# EAGLE board Optogenetic-stimulator-v2 (EAGLE 9.6.2)
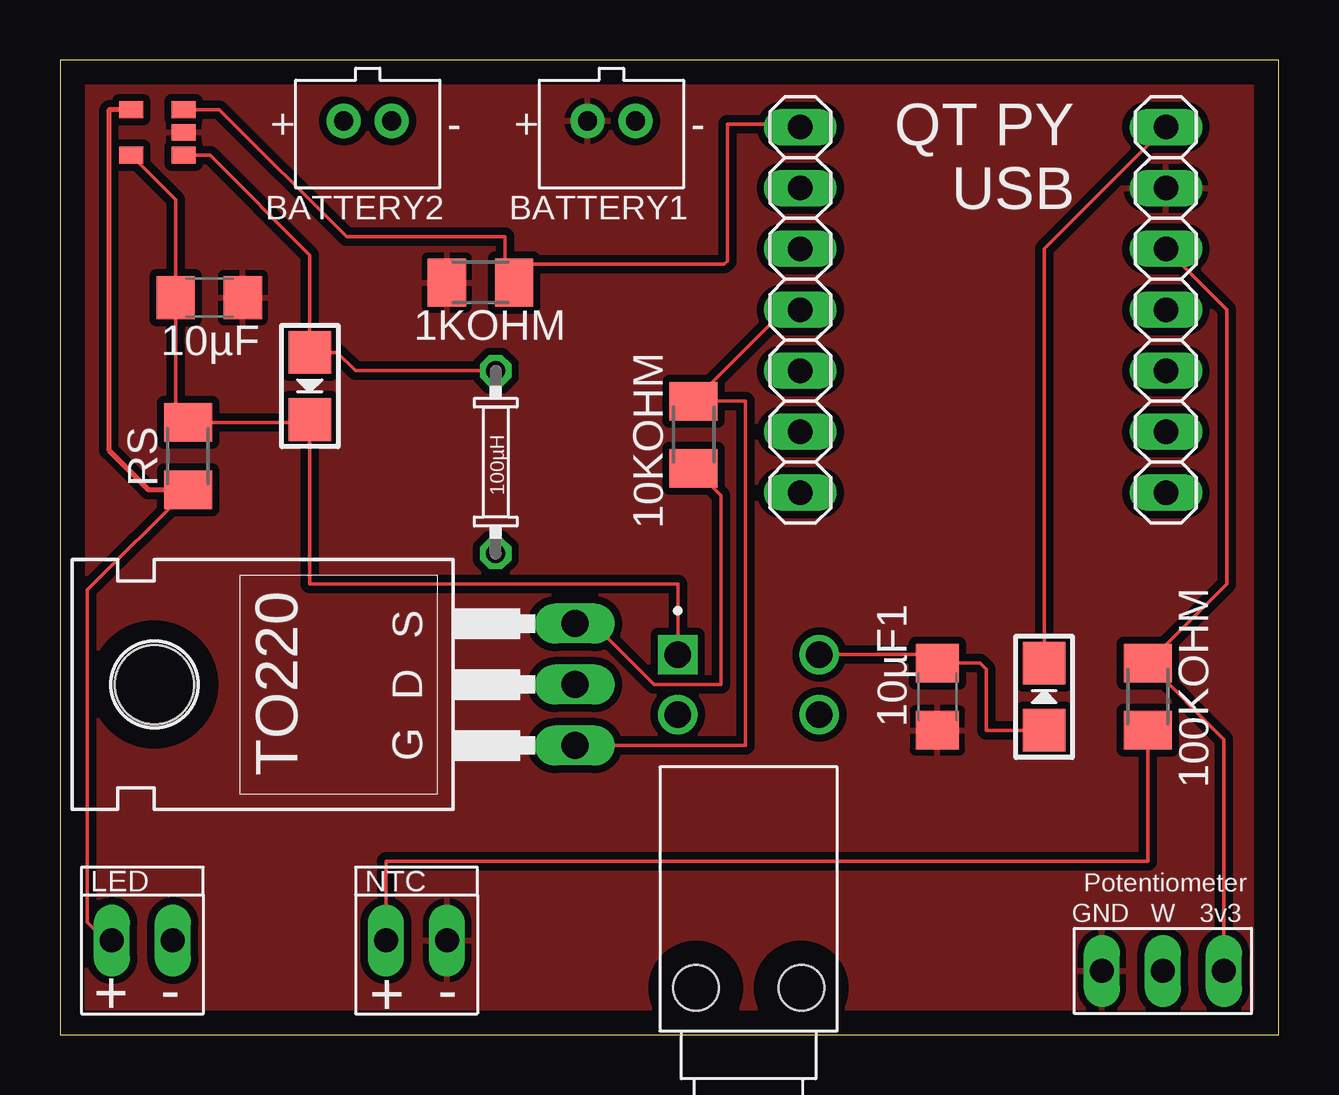
[diagram p0: board, top side]
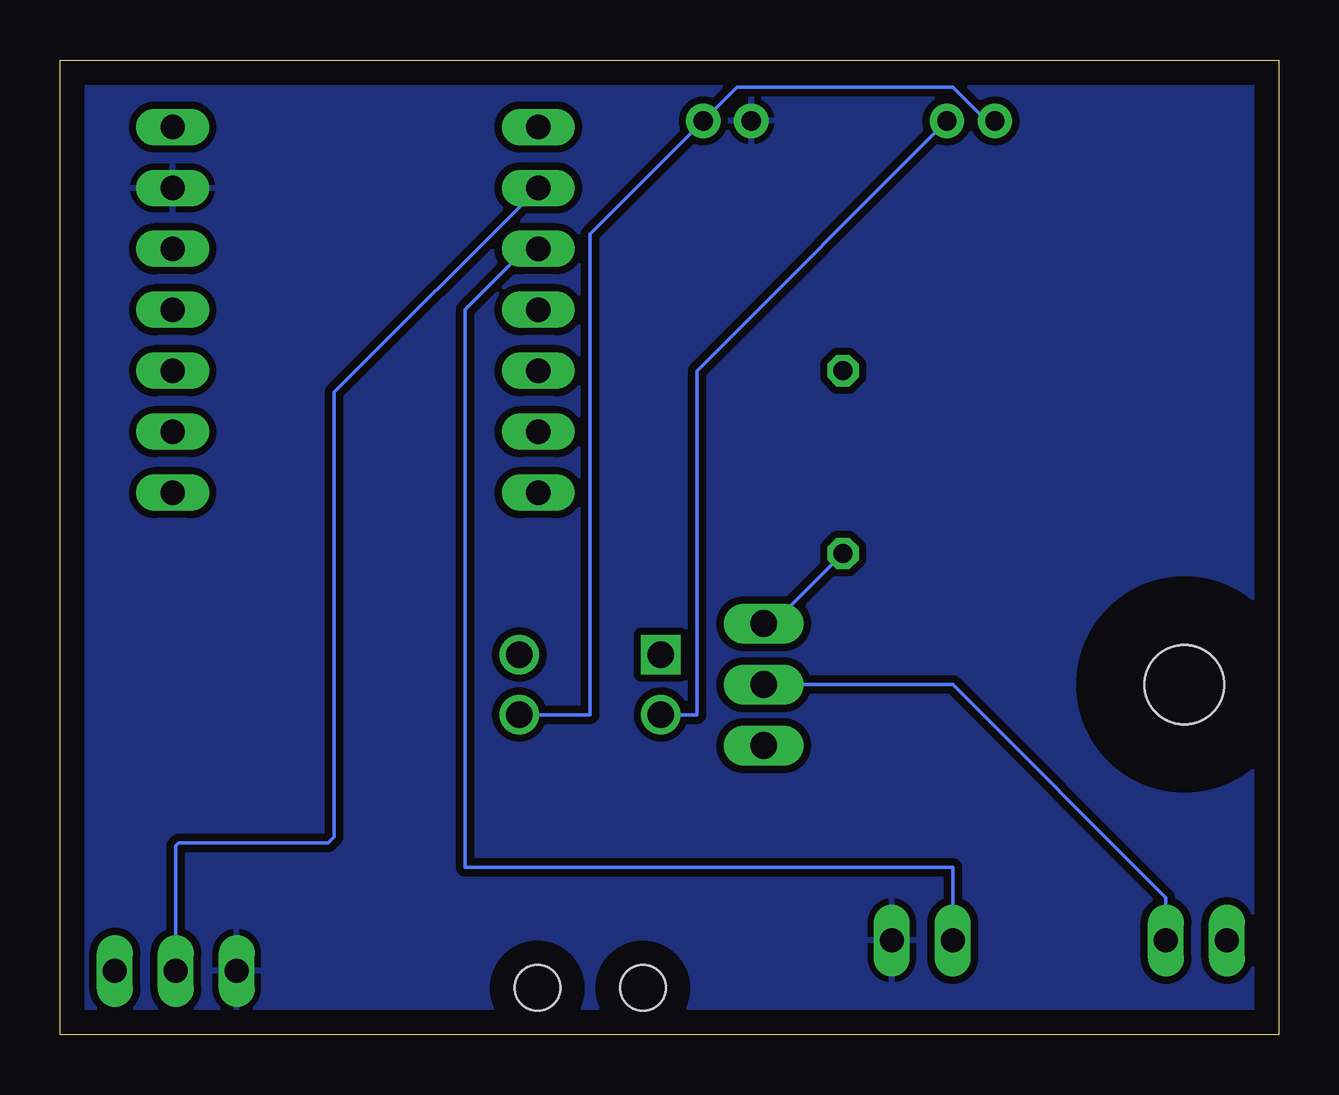
[diagram p1: board, bottom side, seen from below]

Size 50.8 x 40.64 mm. Coordinates in mm from the lower left corner, seen from the top.
Outline: 0,0 50.8,0 50.8,40.64 0,40.64 0,0
Copper layers (1*16): Top 0.035mm / dielectric 1.5mm / Bottom 0.035mm
Design rules "default": minimum track width 6mil, minimum drill 0.35mm, track to track 6mil, track to pad 6mil, pad to pad 6mil, via to via 6mil, smd to smd 6mil, copper to edge 40mil, drill to drill 6mil, minimum pad ring 10mil, minimum via ring 8mil, stop-mask expansion 4mil, vias tented up to drill 0mil, thermal gap 10mil

## Footprints (pad centres in the part's own frame; a part is rotated, then mirrored left to right if it is on the bottom)
M1206 = smd 1.6 x 2: 1 -1.4,0; 2 1.4,0
C1206 = smd 1.6 x 1.8: 1 -1.4,0; 2 1.4,0
AL8860WT = smd 1 x 0.7: CTRL -1.1,-2.25; GND -1.1,-1.3; SET 1.1,-2.25; SW -1.1,-0.35; VIN 1.1,-0.35
JST-PH-2-THM = drill 0.8 pad 1.422: 1 1,0; 2 -1,0
DIODE = smd 1.778 x 1.778: P$1 -1.397,0; P$2 1.397,0
UNIVERSAL_PAD = drill 1 long: P$1 -1.27,0; P$2 1.27,0
1X07 = drill 1.016 long: 1 -7.62,0; 2 -5.08,0; 3 -2.54,0; 4 0,0; 5 2.54,0; 6 5.08,0; 7 7.62,0
SW_PB400EEQR1BLK = drill 1.1 square: 1 -1.25,-2.95 | drill 1.1: 2 1.25,-2.95; 3 -1.25,2.95; 4 1.25,2.95 | hole 1.9: 12.65,2.2; 12.65,-2.2
TO220 = drill 1.118 long: 1 -2.54,-6.35; 2 0,-6.35; 3 2.54,-6.35 | hole 3.302: 0,11.176
INDUCTOR = drill 0.8 pad 1.27 octagon: P$1 0,0; P$2 0,-7.62
POTENTIOMETER_BOARD = drill 1 long: 3V3 2.54,0; GND -2.54,0; W 0,0

## Placement (x,y rotation side)
1KOHM  1k Ohm  [M1206]  17.53,31.37 180 top
10KOHM  [M1206]  26.42,25.02 270 top
10µF  10µF  [C1206]  6.22,30.73 180 top
10µF1  10µF  [C1206]  36.58,14.1 90 top
100KOHM  100k Ohm  [M1206]  45.34,14.1 270 top
AL8860WT1  AL8860WT  [AL8860WT]  4.06,36.32 180 top
BATTERY1  [JST-PH-2-THM]  22.99,38.1 180 top
BATTERY2  [JST-PH-2-THM]  12.83,38.1 180 top
DIODE1  DIODE_BOARD  [DIODE]  41.02,14.1 90 top
DIODE2  DIODE_BOARD  [DIODE]  10.41,27.05 270 top
LED  UNIVERSAL_PAD  [UNIVERSAL_PAD]  3.43,3.94 0 top
NTC  UNIVERSAL_PAD  [UNIVERSAL_PAD]  14.86,3.94 0 top
PY  [1X07]  46.1,30.23 270 top
QT  [1X07]  30.86,30.23 270 top
RS  0.15OHM  [M1206]  5.33,24.13 90 top
S1  PB400EEQR1BLK  [SW_PB400EEQR1BLK]  28.7,14.61 270 top
TO220  [TO220]  15.11,14.61 90 top
U$1  BOARD_INDUCTOR  [INDUCTOR]  18.16,20.07 180 top
U$6  POTENTIOMETER_BOARD  [POTENTIOMETER_BOARD]  45.97,2.67 0 top

## Library data of the parts
1KOHM 10KOHM 100KOHM RS = rcl; SPICEPREFIX: R
10µF 10µF1 = rcl; SPICEPREFIX: C
AL8860WT1 = AL8860WT
BATTERY1 BATTERY2 = adafruit
DIODE1 DIODE2 = DIODE_BOARD
LED NTC = UNIVERSAL_PAD
PY QT = pinhead
S1 = Custom_Board; AVAILABILITY: In Stock; CHECK_PRICES: https://www.snapeda.com/parts/PB400EEQR1BLK/E-Switch/view-part/?ref=eda; DESCRIPTION: Pushbutton Switch, DPST,OFF-ON, Round Actuator,3A,30VDC, R/A PC, PB400 Series | E-Switch PB400EEQR1BLK; MF: E-Switch; MP: PB400EEQR1BLK; PACKAGE: None; PRICE: None; PURCHASE-URL: https://www.snapeda.com/api/url_track_click_mouser/?unipart_id=2760202&manufacturer=E-Switch&part_name=PB400EEQR1BLK&search_term=None; SNAPEDA_LINK: https://www.snapeda.com/parts/PB400EEQR1BLK/E-Switch/view-part/?ref=snap
TO220 = Custom_Board
U$1 = INDUCTOR_BOARD
U$6 = POTENTIOMETER_BOARD

## Nets
3V3: 100KOHM.1 PY.3 U$6.3V3
7V: 10µF.2 AL8860WT1.VIN DIODE2.P$2 RS.2 S1.1
A0: 1KOHM.1 AL8860WT1.CTRL QT.1
A3: 10KOHM.1 QT.4 TO220.1
GND: 1KOHM.2 10µF1.1 10µF.1 AL8860WT1.GND BATTERY1.1 NTC.P$2 PY.2 U$6.GND
N$1: BATTERY1.2 BATTERY2.1 S1.4
N$2: DIODE1.P$2 PY.1
N$3: LED.P$2 TO220.2
N$4: 10µF1.2 DIODE1.P$1 S1.3
N$5: 100KOHM.2 NTC.P$1 QT.3
N$6: BATTERY2.2 S1.2
N$8: AL8860WT1.SW DIODE2.P$1 U$1.P$2
N$9: QT.2 U$6.W
N$10: AL8860WT1.SET LED.P$1 RS.1
N$11: 10KOHM.2 TO220.3 U$1.P$1

## Tracks (layer width: path | path; a pad name or v marks a point on that pad's centre or on a via)
3V3
  Top 0.152: PY.3 48.64,30.23 48.64,18.8 100KOHM.1 48.51,12.32 U$6.3V3
7V
  Top 0.152: AL8860WT1.VIN 4.82,34.81 10µF.2 4.82,26.04 RS.2 10.29,25.53 DIODE2.P$2 10.41,18.8 25.75,18.8 S1.1
A0
  Top 0.152: 30.73,37.72 QT.1 30.73,37.97 27.81,37.97 27.81,32.26 27.69,32.13 19.69,32.13 1KOHM.1 18.55,31.75 18.55,33.27 18.54,33.27 11.94,33.27 6.64,38.57 AL8860WT1.CTRL
A3
  Top 0.152: TO220.1 28.57,12.06 28.57,26.42 10KOHM.1 30.22,30.23 QT.4
GND
  pour Bottom (isolate 0.305): 0,40.64 50.8,40.64 50.8,0 0,0
  pour Top (isolate 0.305): 0,40.64 50.8,40.64 50.8,0 0,0
N$1
  Bottom 0.152: BATTERY2.1 12.19,38.1 13.59,39.5 22.59,39.5 BATTERY1.2 28.7,33.38 28.7,13.34 31.6,13.34 31.62,13.36 | 31.09,13.36 31.62,13.36 | 31.62,13.36 S1.4
N$2
  Top 0.152: DIODE1.P$2 41.02,32.77 PY.1
N$3
  Bottom 0.152: LED.P$2 4.7,5.71 13.59,14.61 TO220.2
N$4
  Top 0.152: S1.3 36.22,15.86 10µF1.2 38.35,15.5 38.61,15.24 38.61,12.7 DIODE1.P$1
N$5
  Top 0.152: 100KOHM.2 45.34,7.24 13.59,7.24 NTC.P$1
  Bottom 0.152: QT.3 31.37,32.77 33.91,30.23 33.91,6.99 13.59,6.99 NTC.P$1
N$6
  Bottom 0.152: 25.77,13.34 S1.2 25.73,13.34 24.26,13.34 24.26,27.67 BATTERY2.2
N$8
  Top 0.152: AL8860WT1.SW 6.25,36.67 10.41,32.51 DIODE2.P$1 11.56,28.45 12.32,27.69 U$1.P$2
N$9
  Bottom 0.152: QT.2 39.37,26.8 39.37,8.26 39.62,8 45.85,8 45.97,7.87 U$6.W
N$10
  Top 0.152: RS.1 1.14,18.54 1.14,4.7 1.91,3.94 LED.P$1
  Top 0.2: AL8860WT1.SET 2.08,38.57 2.03,38.53 2.03,24.38 3.69,22.73 RS.1
N$11
  Top 0.152: TO220.3 22.23,17.14 24.77,14.61 27.56,14.61 27.56,22.48 10KOHM.2
  Bottom 0.152: TO220.3 21.08,17.14 U$1.P$1

## Text on the board
tPlace: QT PY / USB | + | + | - | -